# EAGLE board driver (EAGLE 9.6.2)
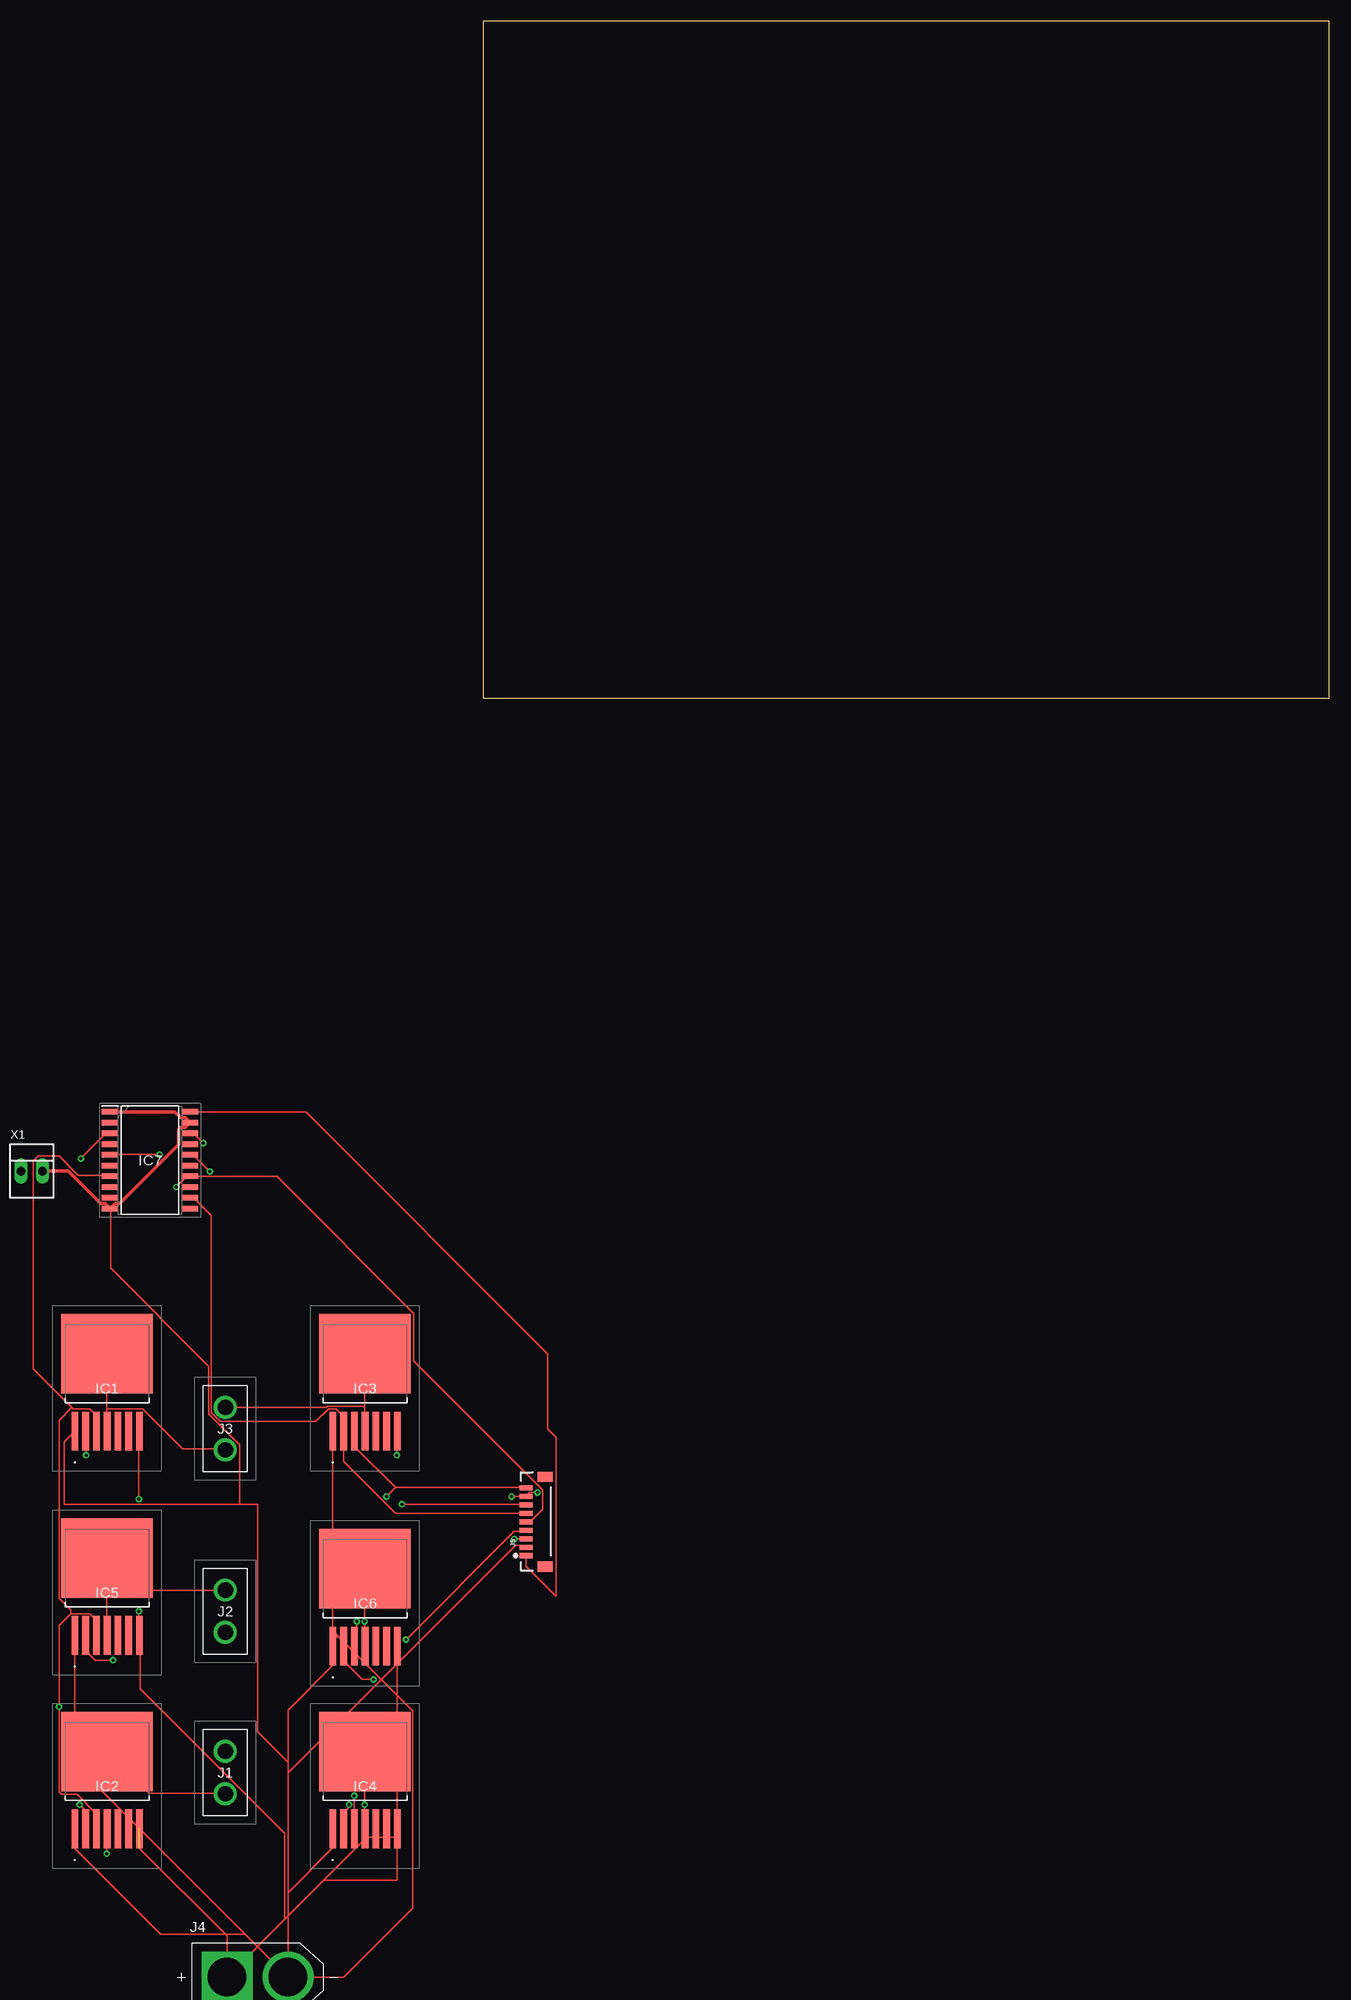
[diagram p0: board, top side]
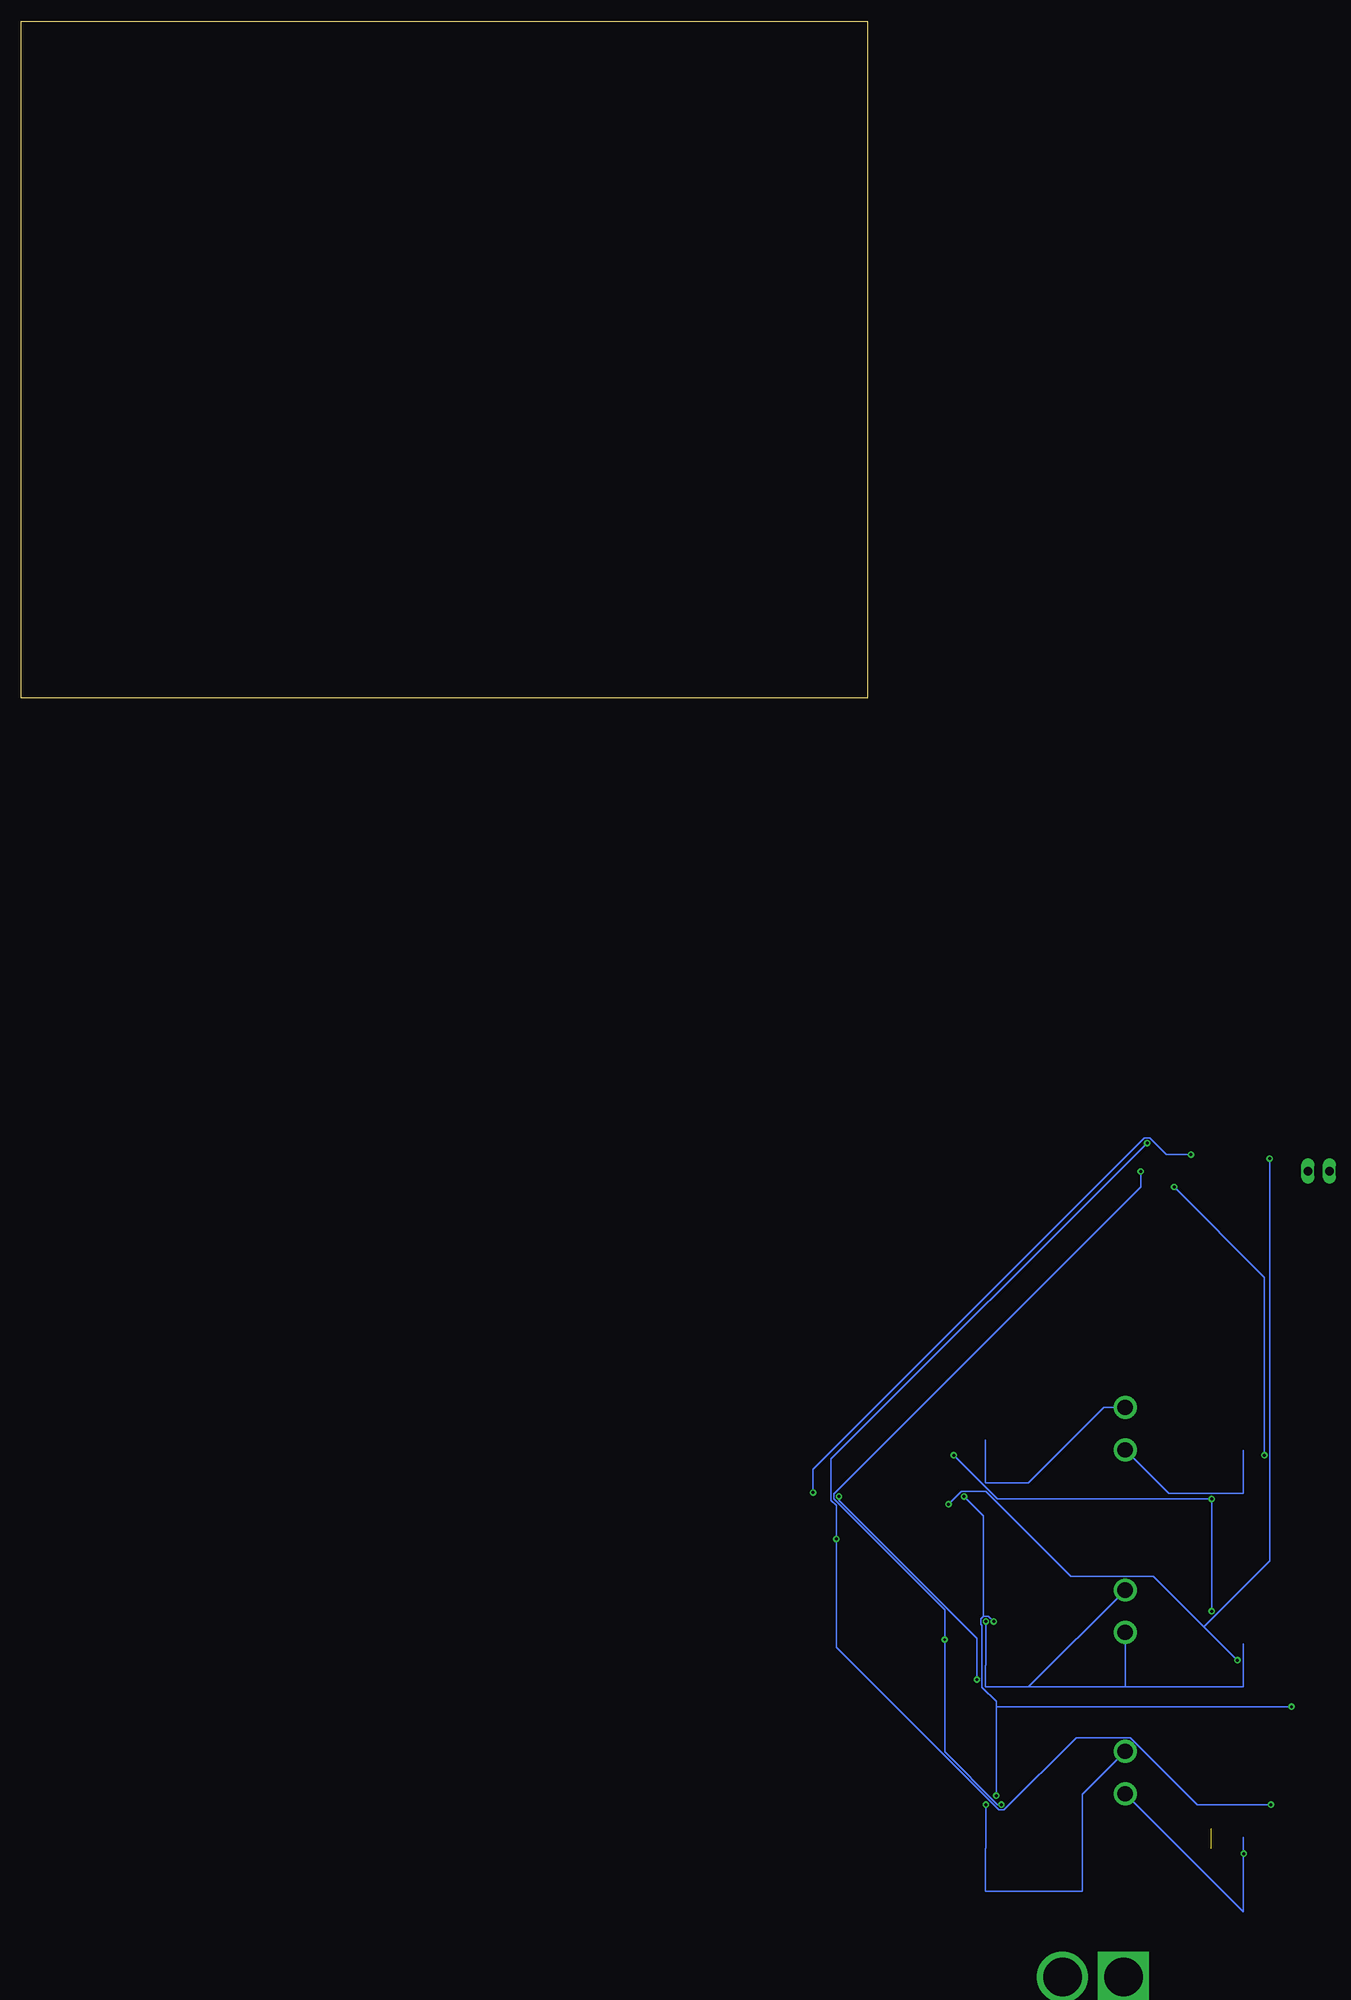
[diagram p1: board, bottom side, seen from below]

Size 100 x 80 mm. Coordinates in mm from the lower left corner, seen from the top.
Outline: 0,0 100,0 100,80 0,80 0,0
Copper layers (1*16): Top 0.035mm / dielectric 1.5mm / Bottom 0.035mm
Design rules "default": minimum track width 6mil, minimum drill 0.35mm, track to track 6mil, track to pad 6mil, pad to pad 6mil, via to via 6mil, smd to smd 6mil, copper to edge 40mil, drill to drill 6mil, minimum pad ring 10mil, minimum via ring 8mil, stop-mask expansion 4mil, vias tented up to drill 0mil, thermal gap 10mil

## Footprints (pad centres in the part's own frame; a part is rotated, then mirrored left to right if it is on the bottom)
BTS7960B = smd 0.8 x 4.6: 1 -3.81,-9.15; 2 -2.54,-9.15; 3 -1.27,-9.15; 4 0,-9.15; 5 1.27,-9.15; 6 2.54,-9.15; 7 3.81,-9.15 | smd 10.8 x 9.4: 8 0,0
SOIC127P1030X265-20N = smd 1.95 x 0.65: 1 -4.725,5.715; 2 -4.725,4.445; 3 -4.725,3.175; 4 -4.725,1.905; 5 -4.725,0.635; 6 -4.725,-0.635; 7 -4.725,-1.905; 8 -4.725,-3.175; 9 -4.725,-4.445; 10 -4.725,-5.715; 11 4.725,-5.715; 12 4.725,-4.445; 13 4.725,-3.175; 14 4.725,-1.905; 15 4.725,-0.635; 16 4.725,0.635; 17 4.725,1.905; 18 4.725,3.175; 19 4.725,4.445; 20 4.725,5.715
XT30PB = drill 1.8 pad 2.7: 1 0,0; 2 0,-5
AMASS_XT60-M = drill 4.55 pad 6: N 3.6,0 | drill 4.55 pad 6 square: P -3.6,0
JST-6-SMD-VERT-1.0MM = smd 0.6 x 1.55: 1 -3.54,1.27; 2 -2.54,1.27; 3 -1.54,1.27; 4 -0.54,1.27; 5 0.46,1.27; 6 1.46,1.27; 7 2.46,1.27; 8 3.46,1.27; 9 4.46,1.27 | smd 1.2 x 1.8: P$1 -4.84,-0.955; P$2 5.76,-0.955
22-23-2021 = drill 1 long: 1 -1.27,0; 2 1.27,0

## Placement (x,y rotation side)
IC1  BTS7960B  [BTS7960B]  -44.45,-77.47 0 top  (outside the outline)
IC2  BTS7960B  [BTS7960B]  -44.45,-124.46 0 top  (outside the outline)
IC3  BTS7960B  [BTS7960B]  -13.97,-77.47 0 top  (outside the outline)
IC4  BTS7960B  [BTS7960B]  -13.97,-124.46 0 top  (outside the outline)
IC5  BTS7960B  [BTS7960B]  -44.45,-101.6 0 top  (outside the outline)
IC6  BTS7960B  [BTS7960B]  -13.97,-102.87 0 top  (outside the outline)
IC7  SN74AHC244DW  [SOIC127P1030X265-20N]  -39.37,-54.61 0 top  (outside the outline)
J1  XT30PB  [XT30PB]  -30.48,-124.46 0 top  (outside the outline)
J2  XT30PB  [XT30PB]  -30.48,-105.41 0 top  (outside the outline)
J3  XT30PB  [XT30PB]  -30.48,-83.82 0 top  (outside the outline)
J4  XT60-M  [AMASS_XT60-M]  -26.67,-151.13 0 top  (outside the outline)
J5  JST_6_PIN_VERTICAL  [JST-6-SMD-VERT-1.0MM]  6.35,-97.79 90 top  (outside the outline)
X1  22-23-2021  [22-23-2021]  -53.34,-55.88 0 top  (outside the outline)

## Library data of the parts
IC1-IC6 = BTS7960B; DESCRIPTION: Path resistance of typ. 16 m @ 25 C; HEIGHT: 4.4mm; MANUFACTURER_NAME: Rochester Electronics; MANUFACTURER_PART_NUMBER: BTS7960B
IC7 = SN74AHC244DW; ARROW_PART_NUMBER: SN74AHC244DW; ARROW_PRICE-STOCK: https://www.arrow.com/en/products/sn74ahc244dw/texas-instruments?region=nac; DESCRIPTION: SN74AHC244DW, Octal Bus Buffer, AHC, 11.9 @ 3.3 Vns, 8mA 2 to 5.5V 20-Pin SOIC; HEIGHT: 2.65mm; MANUFACTURER_NAME: Texas Instruments; MANUFACTURER_PART_NUMBER: SN74AHC244DW; MOUSER_PART_NUMBER: 595-SN74AHC244DW; MOUSER_PRICE-STOCK: https://www.mouser.co.uk/ProductDetail/Texas-Instruments/SN74AHC244DW?qs=j%2FZo4ajzVJKtLyxm%252BX3lew%3D%3D
J1-J3 = XT30PB; DESCRIPTION: Mini XT60 XT30 Connector for RC Multirotor Racing Drone Quadcopter; HEIGHT: 10.7mm; MANUFACTURER_NAME: Amass; MANUFACTURER_PART_NUMBER: XT30PB
J4 = XT60-M; AVAILABILITY: Not in stock; DESCRIPTION: Plug; DC supply; XT60; male; PIN: 2; for cable; soldered; 30A; 500V; MF: AMASS; MP: XT60-M; PACKAGE: Package; PRICE: None
J5 = SparkFun-Connectors_JST_SH; PROD_ID: CONN-08249; SF_ID: GPS-00579
X1 = con-molex; MF: MOLEX; MPN: 22-23-2021; OC_FARNELL: 1462926; OC_NEWARK: 25C3832

## Nets
2A4: IC7.17
GND: IC1.1 IC2.1 IC3.1 IC4.1 IC5.1 IC6.1 IC7.1 IC7.10 IC7.19 J4.N J5.2 X1.2
INH: IC1.3 IC2.3 IC3.3 IC4.3 IC5.3 IC6.3 IC7.7 J5.9
N$1: IC2.6
N$2: IC1.6
N$3: IC1.5
N$4: IC2.5
N$5: IC3.6
N$6: IC3.5
N$7: IC4.6
N$8: IC4.5
N$9: IC5.6
N$10: IC5.5
N$11: IC6.6
N$12: IC6.5
N$13: IC7.2
N$15: X1.1
N$16: IC7.4
N$18: IC7.6
N$20: IC7.8
N$25: IC7.15
N$26: IC7.13
N$27: IC7.11
OUT1: IC2.4 IC2.8 J1.2
OUT2: IC4.4 IC4.8 J1.1
OUT3: IC6.4 IC6.8 J2.2
OUT4: IC5.4 IC5.8 J2.1
OUT5: IC3.4 IC3.8 J3.1
OUT6: IC1.4 IC1.8 J3.2
S1: IC2.2 IC7.18 J5.3
S2: IC4.2 IC7.16 J5.4
S3: IC1.2 IC7.14 J5.5
S4: IC3.2 IC7.12 J5.6
S5: IC5.2 IC7.3 J5.7
S6: IC6.2 IC7.5 J5.8
VCC: IC7.20 J5.1
VS: IC1.7 IC2.7 IC3.7 IC4.7 IC5.7 IC6.7 J4.P

## Tracks (layer width: path | path; a pad name or v marks a point on that pad's centre or on a via)
GND
  Top 0.152: -17.78,-135.89 -17.83,-135.94 | -17.83,-135.94 -23.07,-141.18 J4.N | J4.N -23.07,-119.59 -17.78,-114.3 | J5.2 4.87,-100.12 3.81,-100.12 -23.07,-127 J4.N | J4.N -28.15,-146.05 -38.1,-146.05 -48.26,-135.89 -48.31,-135.94 -48.31,-133.66 IC2.1 | J4.N -48.26,-125.94 -48.26,-111.76 -48.31,-111.71 -48.31,-110.8 IC5.1 | -17.22,-110.79 -8.34,-119.67 -8.34,-143 -16.47,-151.13 J4.N | -17.22,-110.79 -17.78,-110.23 -17.78,-88.9 -17.83,-88.85 -17.83,-86.72 IC3.1 | J4.N -23.07,-125.73 -26.67,-122.13 -26.67,-95.25 -28.8,-95.25 | -28.8,-95.25 -49.53,-95.25 -49.53,-87.89 IC1.1 | -17.83,-135.94 -17.83,-133.66 IC4.1 | -17.22,-110.79 -17.68,-111.25 -17.68,-112.01 IC6.1 | -28.8,-95.25 -28.8,-88.24 -32.46,-84.58 -32.46,-78.94 -44.04,-67.36 -44.04,-60.5 IC7.10
  Top 0.4: X1.2 -49.07,-55.88 -45.22,-59.73 -44.69,-59.73 IC7.10 -43.5,-59.73 -42.97,-59.73 -35.97,-52.73 -35.97,-50.96 -35.77,-50.76 -35.24,-50.76 IC7.19 -35.24,-49.57 -35.77,-49.57 -36.44,-48.9 IC7.1
INH  (via drill 0.35)
  Top 0.152: v-15.24,-129.69 IC4.3 | v-14.94,-109.12 -14.94,-111.71 IC6.3 | -10.36,-93.27 5.03,-93.27 J5.9 | -10.36,-93.27 -15.24,-88.39 IC3.3 | -10.36,-93.27 v-11.43,-94.34 | IC2.3 -45.72,-131.83 -48.01,-129.54 -49.84,-129.54 -50.14,-129.24 v-50.14,-119.18 -50.14,-109.58 -48.77,-108.2 | -48.77,-108.2 -46.48,-108.2 -45.72,-108.97 IC5.3 | -48.62,-83.82 -48.46,-83.97 -46.48,-83.97 -45.72,-84.73 IC1.3 | -48.62,-83.82 -53.19,-79.25 -53.19,-54.71 -52.58,-54.1 -50.14,-54.1 -47.85,-56.39 -44.2,-56.39 IC7.7 | -48.77,-108.2 -48.77,-107.75 -50.14,-106.38 -50.14,-85.34 -48.62,-83.82
  Bottom 0.152: -15.24,-119.18 -15.24,-118.57 -13.56,-116.89 -13.56,-109.58 -13.41,-109.42 -13.41,-108.81 -13.72,-108.51 | -15.24,-119.18 v-15.24,-129.69 | -13.72,-108.51 -14.33,-108.51 v-14.94,-109.12 | -13.72,-108.51 -13.72,-96.62 v-11.43,-94.34 | v-50.14,-119.18 -15.24,-119.18
OUT1  (via drill 0.35)
  Top 0.152: v-44.5,-136.55 -44.5,-133.66 IC2.4 | J1.2 -30.48,-129.39 -39.47,-129.39 -44.35,-124.51 IC2.8
  Bottom 0.152: J1.2 -44.45,-143.43 -44.45,-136.55 | -44.45,-136.55 -44.45,-134.62 | v-44.5,-136.55 -44.45,-136.55
OUT2  (via drill 0.35)
  Top 0.152: IC4.4 -14.02,-133.5 v-14.02,-130.76 -14.02,-124.51 IC4.8
  Bottom 0.152: J1.1 -25.4,-129.54 -25.4,-140.97 -13.97,-140.97 -13.97,-135.94 | -13.97,-135.94 -13.97,-135.89 | v-14.02,-130.76 -14.02,-135.94 -13.97,-135.94
OUT3  (via drill 0.35)
  Top 0.152: IC6.4 -14.02,-112.01 v-14.02,-109.12 -14.02,-102.87 IC6.8
  Bottom 0.152: J2.2 -30.48,-116.84 -13.97,-116.84 -13.97,-114.3 -14.02,-114.3 v-14.02,-109.12
OUT4
  Top 0.152: -44.5,-105.46 -44.5,-101.65 IC5.8 -44.5,-105.46 | -44.5,-105.46 -44.5,-110.64 IC5.4 | -44.5,-105.46 -30.48,-105.46 J2.1
  Bottom 0.152: J2.1 -19.05,-116.84 -44.45,-116.84 -44.45,-111.76
OUT5
  Top 0.152: -14.02,-83.67 -14.02,-77.57 IC3.8 | -14.02,-83.67 -14.02,-86.56 IC3.4 | J3.1 -18.59,-83.82 -18.44,-83.67 -14.02,-83.67
  Bottom 0.152: J3.1 -27.94,-83.82 -19.05,-92.71 -13.97,-92.71 -13.97,-87.63
OUT6
  Top 0.152: -44.5,-83.97 -44.5,-77.57 IC1.8 | -44.5,-83.97 -44.5,-86.56 IC1.4 | -44.5,-83.97 -40.23,-83.97 -35.51,-88.7 -30.48,-88.7 J3.2
  Bottom 0.152: J3.2 -35.64,-93.98 -44.45,-93.98 -44.45,-88.9
S1  (via drill 0.35)
  Top 0.152: v3.66,-99.36 5.03,-99.36 J5.3 | v-33.07,-52.58 -34.14,-51.51 -34.59,-51.51 IC7.18 | v-47.7,-130.76 -47.09,-131.37 -47.09,-133.5 IC2.2
  Bottom 0.152: v-33.07,-52.58 4.27,-89.92 4.27,-94.79 3.66,-95.4 v3.66,-99.36 3.66,-112.17 -15.54,-131.37 -16.15,-131.37 -24.69,-122.83 -31.09,-122.83 -39.01,-130.76 v-47.7,-130.76
S2  (via drill 0.35)
  Top 0.152: v-9.14,-111.25 3.66,-98.45 5.03,-98.45 J5.4 | v-15.85,-130.76 -15.85,-131.06 -16.46,-131.67 -16.46,-133.5 IC4.2 | v-32.31,-55.93 -34.14,-54.1 -34.59,-54.1 IC7.16
  Bottom 0.152: v-15.85,-130.76 -15.39,-130.76 -9.14,-124.51 v-9.14,-111.25 -9.14,-107.75 3.96,-94.64 3.96,-94.03 -32.31,-57.76 v-32.31,-55.93
S3  (via drill 0.35)
  Top 0.152: J5.5 5.18,-97.23 5.64,-97.23 7.01,-95.86 7.01,-93.57 -8.23,-78.33 -8.23,-72.69 -24.38,-56.54 -34.59,-56.54 IC7.14 -34.75,-56.54 -35.05,-56.54 v-36.27,-57.76 | v-46.94,-89.46 -46.94,-86.72 IC1.2
  Bottom 0.152: v-46.94,-89.46 -46.94,-68.43 v-36.27,-57.76
S4
  Top 0.152: J5.6 -10.35,-96.33 -16.51,-90.17 -16.51,-87.63 -16.46,-87.63 -16.46,-86.72 IC3.2 -16.61,-86.56 -16.61,-84.73 -17.37,-83.97 -18.29,-83.97 -19.81,-85.5 -31.09,-85.5 -32.16,-84.43 -32.16,-61.11 -34.14,-59.13 -34.59,-59.13 IC7.12
S5  (via drill 0.35)
  Top 0.152: v-9.6,-95.25 5.03,-95.25 J5.7 | v-43.74,-113.69 -45.87,-113.69 -46.94,-112.62 -46.94,-110.8 IC5.2 | v-47.55,-54.41 -44.65,-51.51 -44.2,-51.51 IC7.3
  Bottom 0.152: v-9.6,-95.25 -11.12,-93.73 -14.02,-93.73 -24.08,-103.78 -33.83,-103.78 -39.78,-109.73 | v-43.74,-113.69 -39.78,-109.73 | v-47.55,-54.41 -47.55,-101.96 -39.78,-109.73
S6  (via drill 0.35)
  Top 0.152: v3.35,-94.34 5.03,-94.34 J5.8 5.18,-94.18 5.49,-93.88 v6.4,-93.88 | v-12.95,-115.98 -14.33,-115.98 -16.46,-113.84 -16.46,-112.17 IC6.2 | v-38.25,-53.95 -44.04,-53.95 IC7.5
  Bottom 0.152: v3.35,-94.34 3.35,-94.79 -12.95,-111.1 v-12.95,-115.98 | v-38.25,-53.95 -35.36,-53.95 -33.38,-51.97 -32.77,-51.97 6.4,-91.14 v6.4,-93.88
VCC
  Top 0.152: J5.1 5.08,-102.6 8.62,-106.14 8.62,-87.36 7.62,-86.36 7.62,-77.47 -20.95,-48.9 IC7.20
VS  (via drill 0.35)  (1 unrouted)
  Top 0.152: -23.47,-144.33 -18.84,-139.7 | -18.84,-139.7 -10.16,-139.7 -10.16,-133.66 | -10.16,-133.66 IC4.7 | IC4.7 -10.16,-113.08 | -10.16,-113.08 -10.16,-113.03 | -23.47,-144.33 J4.P -30.27,-146.26 -40.64,-135.89 | -18.84,-139.7 -13.76,-134.62 -10.16,-134.62 | IC4.7 -10.21,-133.66 -10.16,-133.66 | -10.16,-113.08 -10.21,-113.08 -10.21,-112.17 IC6.7 | -23.47,-144.33 -23.47,-144.32 -23.47,-134.11 -40.54,-117.04 -40.54,-110.8 IC5.7 -40.69,-110.64 v-40.69,-107.9 | v-40.69,-94.64 -40.69,-86.72 IC1.7 | v-10.21,-89.46 -10.21,-86.72 IC3.7
  Bottom 0.152: v-40.69,-107.9 v-40.69,-94.64 -15.39,-94.64 v-10.21,-89.46